# EAGLE board shield_sh-203 (EAGLE 9.6.2)
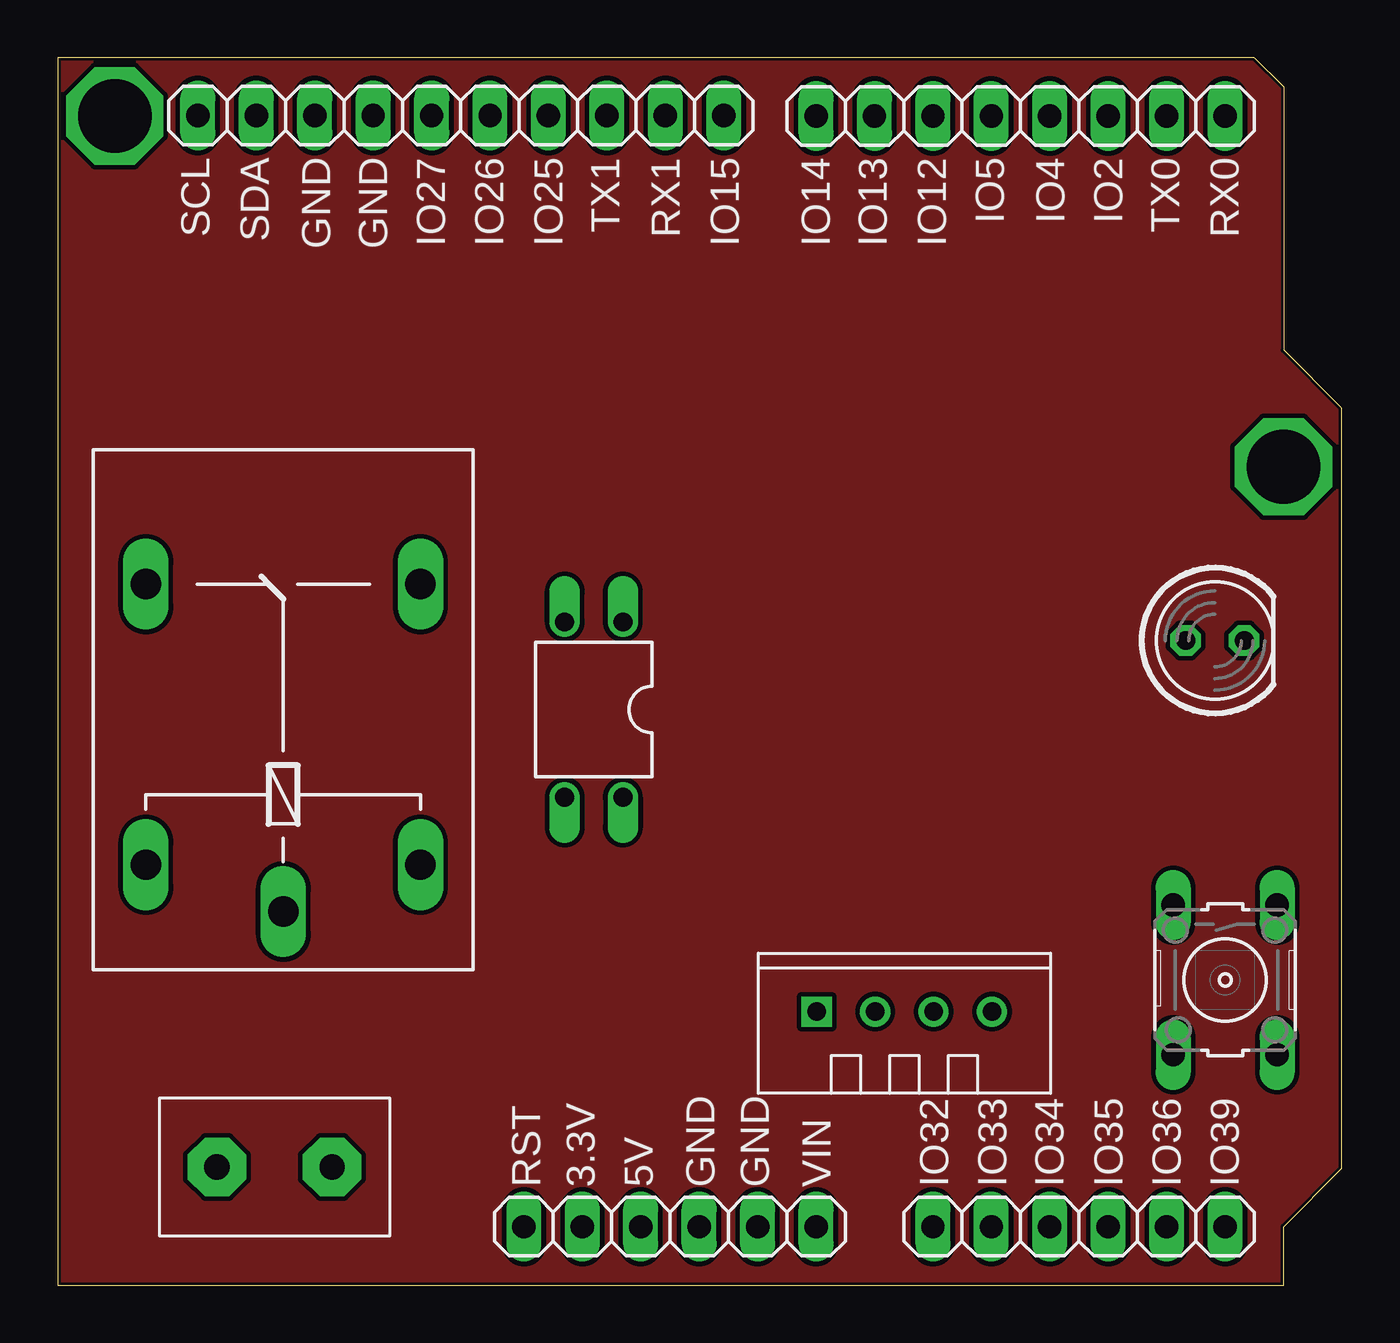
[diagram p0: board, top side]
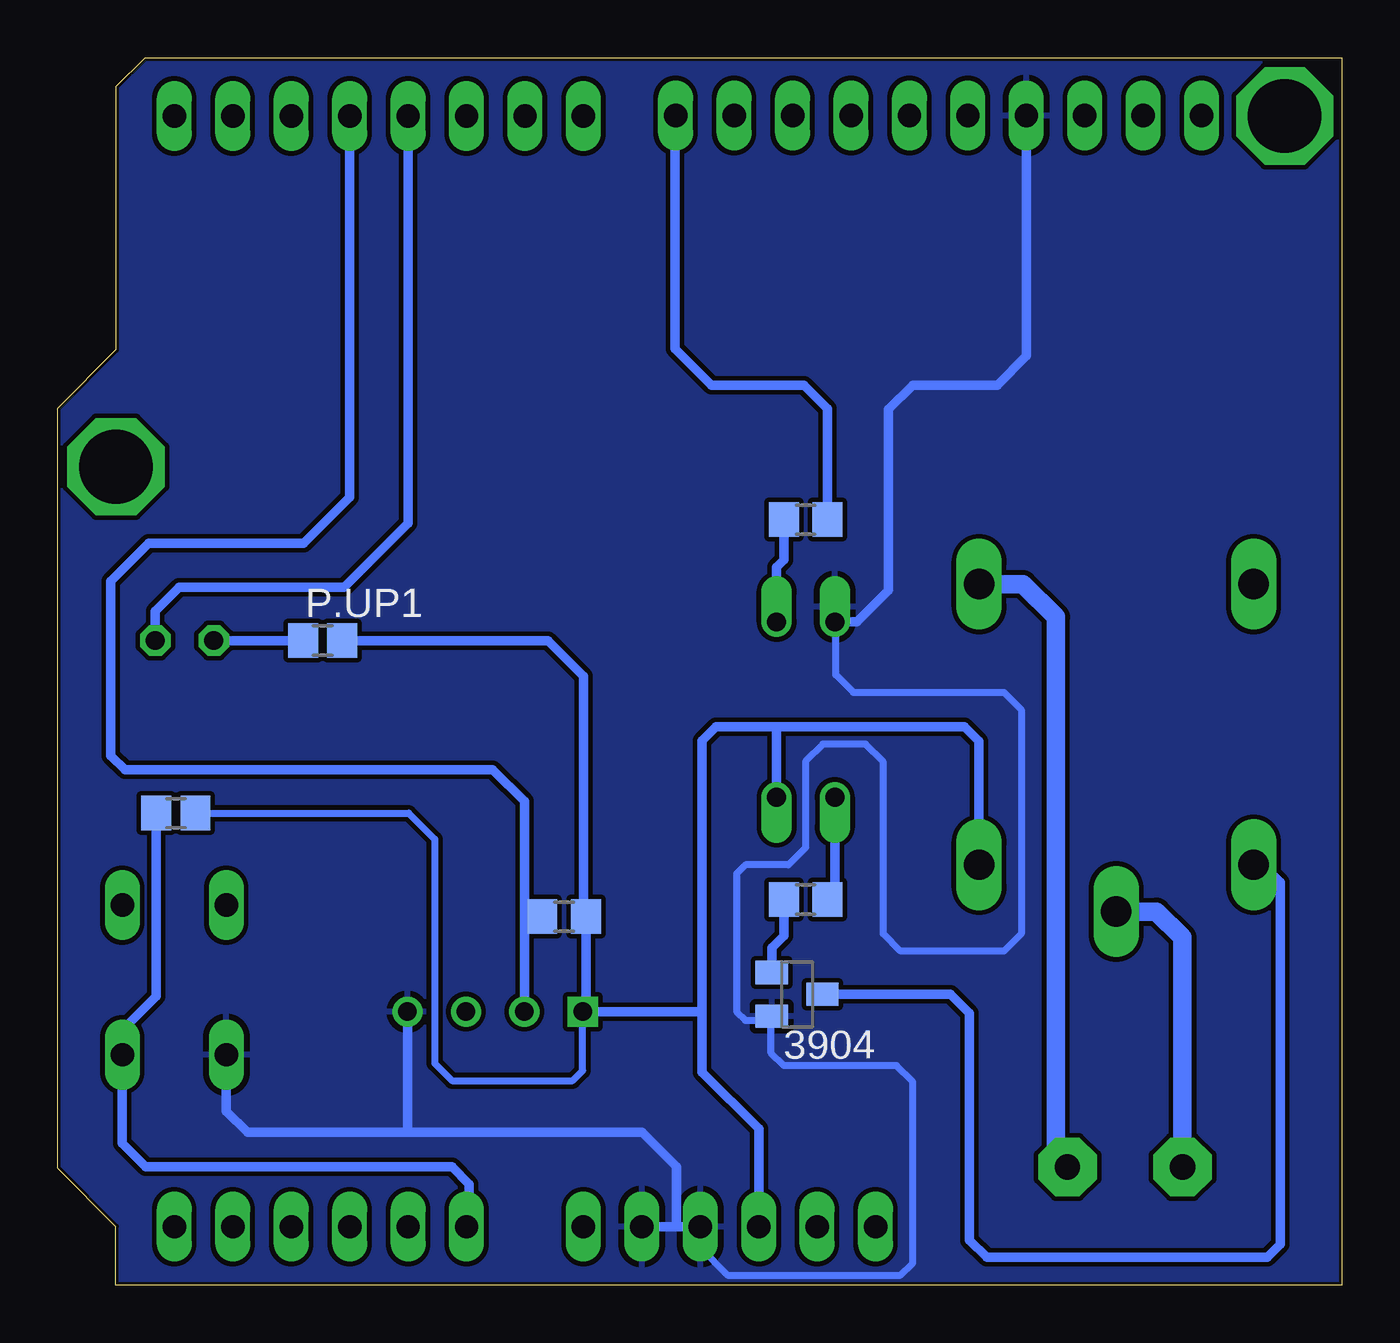
[diagram p1: board, bottom side, seen from below]

Size 55.83 x 53.34 mm. Coordinates in mm from the lower left corner, seen from the top.
Outline: 0,53.34 0,0 53.29,0 53.29,2.54 55.83,5.08 55.83,38.1 53.29,40.64 53.29,52.07 52.02,53.34 0,53.34
Copper layers (1*16): Top 0.035mm / dielectric 1.5mm / Bottom 0.035mm
Design rules "default *": minimum track width 10mil, minimum drill 24mil, track to track 8mil, track to pad 8mil, pad to pad 8mil, via to via 8mil, smd to smd 8mil, copper to edge 5mil, drill to drill 8mil, minimum pad ring 10mil, minimum via ring 8mil, stop-mask expansion 4mil, vias tented up to drill 25mil, thermal gap 10mil

## Footprints (pad centres in the part's own frame; a part is rotated, then mirrored left to right if it is on the bottom)
R0805 = smd 1.3 x 1.5: 1 -0.95,0; 2 0.95,0
SOT23-BEC = smd 1 x 1.4: B -0.95,-1.1; C 0,1.1; E 0.95,-1.1
1X06 = drill 1.016 long: 1 -6.35,0; 2 -3.81,0; 3 -1.27,0; 4 1.27,0; 5 3.81,0; 6 6.35,0
TEMP-HUM-SENSOR-DHT11 = drill 0.8 square: 1 -3.81,0 | drill 0.8: 2 -1.27,0; 3 1.27,0; 4 3.81,0
1X08 = drill 1.016 long: 1 -8.89,0; 2 -6.35,0; 3 -3.81,0; 4 -1.27,0; 5 1.27,0; 6 3.81,0; 7 6.35,0; 8 8.89,0
1X10 = drill 1.016 long: 1 -11.43,0; 2 -8.89,0; 3 -6.35,0; 4 -3.81,0; 5 -1.27,0; 6 1.27,0; 7 3.81,0; 8 6.35,0; 9 8.89,0; 10 11.43,0
G5LE = drill 1.321 long: 1 -7.493,-5.969; 2 -7.493,5.969; O 4.699,5.969; P -9.525,0; S 4.699,-5.969
LED5MM = drill 0.813 octagon: A -1.27,0; K 1.27,0
DIL04 = drill 0.813 offset: 1 -1.27,-3.81; 2 1.27,-3.81; 3 1.27,3.81; 4 -1.27,3.81
R0805' = smd 1.3 x 1.5: 1 -0.85,0; 2 0.85,0
B3F-10XX = drill 1.016 long: 1 -3.251,2.261; 2 3.251,2.261; 3 -3.251,-2.261; 4 3.251,-2.261
2PIN = drill 1.1 pad 2.54 octagon: 1 -2.5,0; 2 2.5,0

## Placement (x,y rotation side)
1K  1k  [R0805]  23.31,33.26 0 bottom
3904  [SOT23-BEC]  23.69,12.63 270 bottom
ADC  [1X06]  44.4,2.54 0 top
DHT11  TEMP-HUM-SENSOR-DHT11  [TEMP-HUM-SENSOR-DHT11]  36.81,11.88 0 top
DIGITALIO  [1X08]  41.86,50.8 0 top
DIGITALIO2  [1X10]  17.53,50.82 0 top
K1  G5L  [G5LE]  9.81,25.76 90 top
LED1  [LED5MM]  50.31,28.01 0 top
OK1  PC817  [DIL04]  23.31,25.01 180 top
P.UP1  10k  [R0805']  44.31,28.01 0 bottom
P.UP2  10k  [R0805']  50.69,20.51 0 bottom
PB1  [B3F-10XX]  50.75,13.26 270 top
POWER  [1X06]  26.62,2.54 0 top
R18  10k  [R0805]  33.81,16.01 180 bottom
R20  330  [R0805]  23.31,16.76 0 bottom
U$8  TBLOCK2PIN  [2PIN]  9.44,5.13 180 top

## Library data of the parts
1K R18 R20 = rcl
3904 = transistor-neu-to92
ADC DIGITALIO DIGITALIO2 POWER = pinhead
DHT11 = diy-modules
K1 = relay; OC_FARNELL: unknown; OC_NEWARK: unknown
LED1 = led
OK1 = optocoupler; MPN: PC817X4J000F; OC_FARNELL: 9707727; OC_NEWARK: 97K7059
P.UP1 P.UP2 = resistor
PB1 = switch-omron; MPN: B3F-1000; OC_FARNELL: 176432; OC_NEWARK: 36M3542
U$8 = Terminal Block 1.1mm hole

## Nets
3.3: POWER.2
5V: DHT11.1 K1.1 OK1.4 P.UP1.2 P.UP2.2 POWER.3 R18.1
A0: ADC.1 P.UP2.1 PB1.2
A1: ADC.2
A2: ADC.3
A3: ADC.4
A4: ADC.5
A5: ADC.6
AREFF: DIGITALIO2.3
D2: DIGITALIO.6
D3: DHT11.2 DIGITALIO.5 R18.2
D4: DIGITALIO.4 LED1.K
D5: DIGITALIO.3
D6: DIGITALIO.2
D7: DIGITALIO.1
D8: 1K.2 DIGITALIO2.10
D9: DIGITALIO2.9
D10: DIGITALIO2.8
D11: DIGITALIO2.7
D12: DIGITALIO2.6
D13: DIGITALIO2.5
GND: 3904.E DHT11.4 DIGITALIO2.4 OK1.2 PB1.4 POWER.4 POWER.5
LOAD: K1.P U$8.2
N$1: K1.S U$8.1
N$2: LED1.A P.UP1.1
N$13: 1K.1 OK1.1
N$14: OK1.3 R20.2
N$15: 3904.B R20.1
N$16: 3904.C K1.2
RST: POWER.1
RXD: DIGITALIO.8
SCL: DIGITALIO2.1
SDA: DIGITALIO2.2
TXD: DIGITALIO.7
VIN: POWER.6

## Tracks (layer width: path | path; a pad name or v marks a point on that pad's centre or on a via)
5V
  Bottom 0.305: P.UP2.2 40.56,20.51 39.44,19.38 39.44,9.63 38.69,8.88 33.44,8.88 33,9.32 DHT11.1
  Bottom 0.406: POWER.3 25.35,6.8 27.81,9.26 27.81,11.88 | 27.81,11.88 27.81,23.66 27.21,24.26 24.61,24.26 | 24.61,24.26 16.41,24.26 15.78,23.63 K1.1 | 27.81,11.88 DHT11.1 32.86,12.02 R18.1 32.96,16.11 32.96,26.46 34.51,28.01 P.UP1.2 | OK1.4 24.58,24.23 24.61,24.26
A0
  Bottom 0.406: ADC.1 37.94,2.66 37.94,4.38 38.69,5.13 51.99,5.13 53.01,6.16 PB1.2 53.01,11.08 51.53,12.56 P.UP2.1
D3
  Bottom 0.406: DHT11.2 35.54,16.01 | R18.2 35.54,16.01 | 35.54,16.01 35.54,21.01 36.91,22.38 52.88,22.38 53.51,23.01 53.51,30.59 51.86,32.23 45.13,32.23 43.13,34.24 DIGITALIO.5
D4
  Bottom 0.406: DIGITALIO.4 40.59,33.1 43.37,30.32 50.55,30.32 51.58,29.29 LED1.K
D7
  Bottom 0.406: 33.06,50.71 DIGITALIO.1
D8
  Bottom 0.406: DIGITALIO2.10 28.99,50.79 28.99,40.68 27.41,39.11 23.39,39.11 22.36,38.09 1K.2
GND
  Bottom 0.305: OK1.2 22,28.77 22,26.52 21.23,25.76 14.69,25.76 13.94,25.01 13.94,15.26 14.69,14.51 19.19,14.51 19.94,15.26 19.94,22.73 20.71,23.51 22.56,23.51 23.31,22.76 23.31,19.01 24.06,18.26 25.94,18.26 26.31,17.88 26.31,11.88 25.94,11.51 24.96,11.51 24.81,11.66 | 24.81,11.66 3904.E | POWER.4 27.89,1.61 26.71,0.43 19.19,0.43 18.66,0.96 18.66,8.84 19.36,9.53 24.26,9.53 24.81,10.09 24.81,11.66
  Bottom 0.406: POWER.4 28.94,2.54 | 28.94,2.54 POWER.5 | PB1.4 48.49,7.56 47.57,6.63 40.56,6.63 | 40.56,6.63 30.44,6.63 28.94,5.13 28.94,2.54 | DHT11.4 40.62,6.7 40.56,6.63 | OK1.2 21.08,28.82 19.71,30.18 19.71,38.06 18.66,39.11 14.98,39.11 13.72,40.37 DIGITALIO2.4
  pour Bottom (isolate 0.406): 0.06,-0.12 53.31,-0.12 53.31,2.51 55.94,5.13 55.94,38.13 53.31,40.76 53.31,52.01 51.81,53.51 0.06,53.51
  pour Bottom: 0.11,39.11 0.11,-0.09 53.31,-0.09 53.31,2.53 55.94,5.16 55.94,38.06 53.31,40.68 53.31,52.06 52.09,53.29 0.11,53.29
LOAD
  Bottom 0.813: K1.P 8.06,16.23 6.94,15.11 U$8.2
N$1
  Bottom 0.813: U$8.1 12.44,6.01 12.44,29.04 13.86,30.46 K1.S
N$2
  Bottom 0.406: LED1.A P.UP1.1
N$3
  pour Top: 0.11,-0.09 53.31,-0.09 53.31,2.36 53.31,2.53 55.94,5.16 55.94,38.06 53.31,40.68 53.31,52.06 52.09,53.29 0.11,53.29
N$5  (via drill 3.2)
  other vias: 2.49,50.8
N$10  (via drill 3.2)
  other vias: 53.29,35.56
N$13
  Bottom 0.406: OK1.1 24.58,31.19 24.26,31.51 1K.1
N$14
  Bottom 0.406: 22.04,19.9 OK1.3 22.04,17.08 R20.2
N$15
  Bottom 0.406: R20.1 24.26,15.18 24.78,14.66 3904.B
N$16
  Bottom 0.406: 3904.C 17.01,12.63 16.19,11.81 16.19,1.96 15.44,1.22 3.25,1.22 2.69,1.78 2.69,17.51 3.44,18.27 K1.2

## Text on the board
tPlace: SCL | SDA | GND | GND | IO27 | IO26 | IO25 | TX1 | RX1 | IO15 | IO14 | IO13 | IO12 | IO5 | IO4 | IO2 | TX0 | RX0 | RST | 3.3V | 5V | GND | GND | VIN | IO32 | IO33 | IO34 | IO35 | IO36 | IO39
tStop: WORKSHOP / SH-203 | RELAY IO15 | LED IO5 | BTN IO32 | DHT IO4 | AC LOAD